# EAGLE board p1-001 (EAGLE 9.6.2)
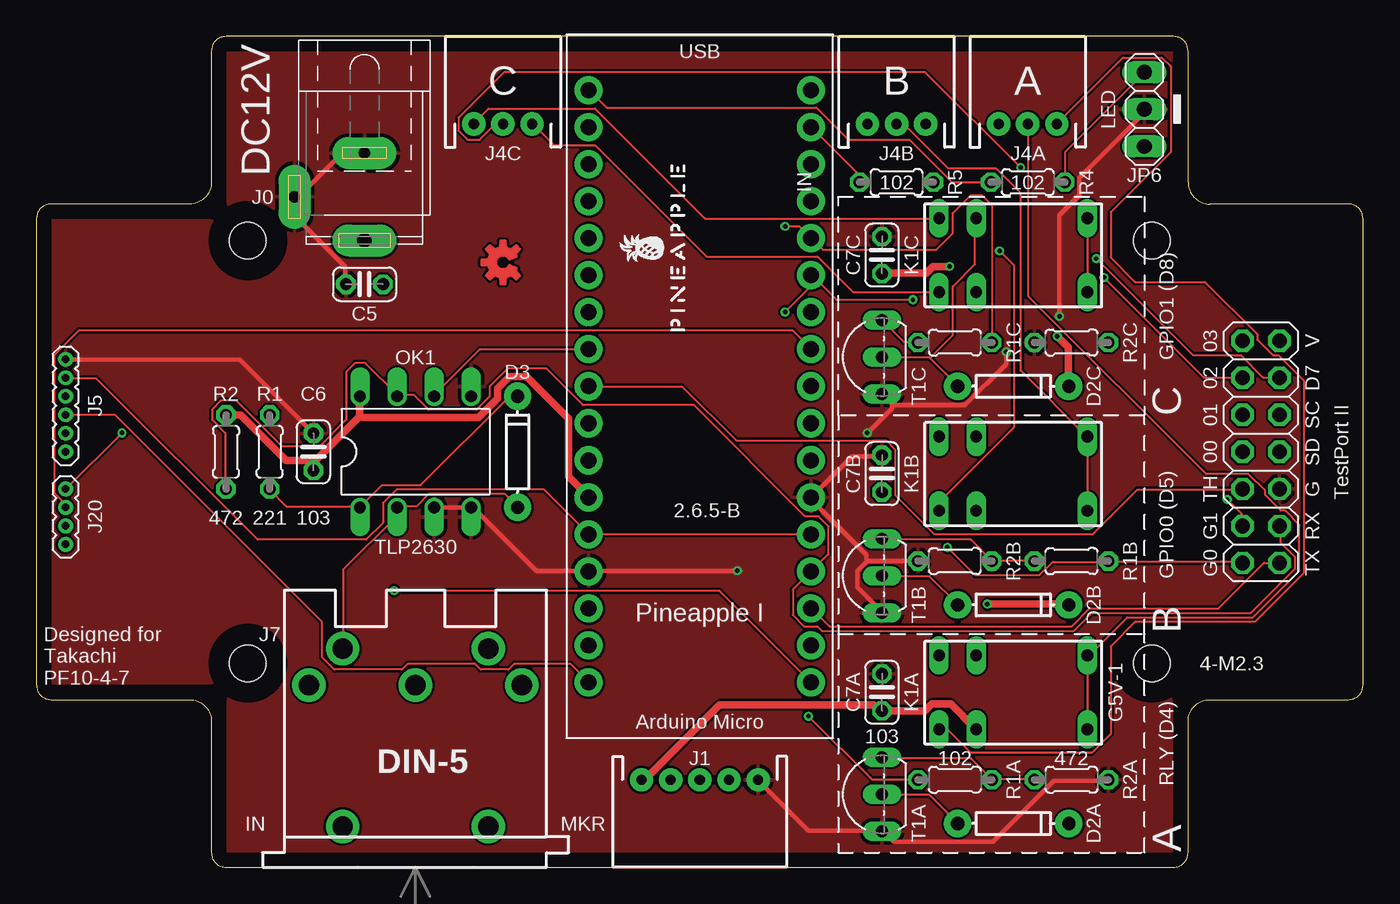
[diagram p0: board, top side]
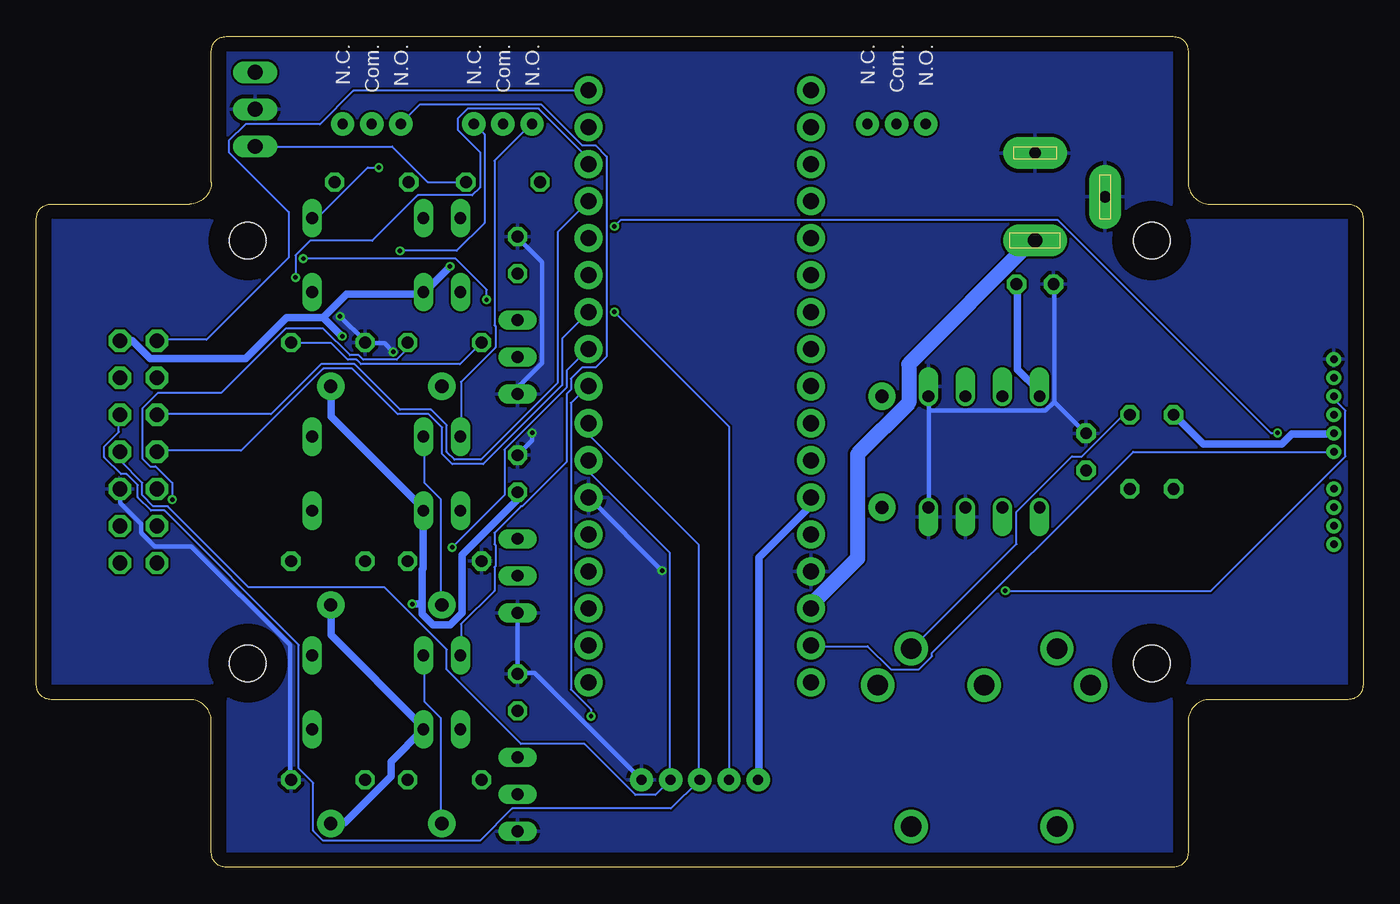
[diagram p1: board, bottom side, seen from below]

Size 91 x 57 mm. Coordinates in mm from the lower left corner, seen from the top.
Outline: 78,57 13,57 arc90 12,56 12,47 arc-90 10.5,45.5 1,45.5 arc90 0,44.5 0,12.5 arc90 1,11.5 10.5,11.5 arc-90 12,10 12,1 arc90 13,0 78,0 arc90 79,1 79,10 arc-90 80.5,11.5 90,11.5 arc90 91,12.5 91,44.5 arc90 90,45.5 80.5,45.5 arc-90 79,47 79,56 arc90 78,57
Copper layers (1*16): Top 0.035mm / dielectric 1.5mm / Bottom 0.035mm
Design rules "SeeedStudio_2layer_DRU_no_angle_20140221": minimum track width 6mil, minimum drill 12mil, track to track 6mil, track to pad 6mil, pad to pad 6mil, via to via 6mil, smd to smd 0mil, copper to edge 10mil, drill to drill 10mil, minimum pad ring 10mil, minimum via ring 6mil, stop-mask expansion 2mil, vias tented up to drill 100mil, thermal gap 10mil
Net classes: 0 default: width 0.152 mm, drill 0.152 mm, clearance 0.152 mm; 1 gnd: width 0.305 mm, drill 0.152 mm, clearance 0.152 mm; 2 power: width 0.508 mm, drill 0.152 mm, clearance 0.152 mm; 3 analog: width 0.305 mm, drill 0.152 mm, clearance 0.152 mm; 4 superpower: width 1.016 mm, drill 0.152 mm, clearance 0.152 mm
Holes 2.5 mm at 76.5,43 14.5,43 14.5,14 76.5,14
tRestrict: area 11.9,40.4 to 17.1,45.6; area 73.9,40.4 to 79.1,45.6; area 11.9,11.4 to 17.1,16.6; area 73.9,11.4 to 79.1,16.6; area 12,56 to 79,57; area 90,11.5 to 91,45.5; area 12,0 to 79,1; area 0,11.5 to 1,45.5; area 0,44.5 to 12,45.5; area 12,45.5 to 13,57; area 78,45.5 to 79,57; area 79,44.5 to 91,45.5; 8 more areas
bRestrict: area 11.9,11.4 to 17.1,16.6; area 73.9,11.4 to 79.1,16.6; area 73.9,40.4 to 79.1,45.6; area 11.9,40.4 to 17.1,45.6; area 78,0 to 79,11.5; area 79,11.5 to 91,12.5; area 90,11.5 to 91,45.5; area 79,44.5 to 91,45.5; area 78,45.5 to 79,57; area 12,56 to 79,57; area 12,45.5 to 13,57; area 0,44.5 to 12,45.5; 8 more areas

## Footprints (pad centres in the part's own frame; a part is rotated, then mirrored left to right if it is on the bottom)
C025-024X044 = drill 0.813 octagon: 1 -1.27,0; 2 1.27,0
DIODE-1N4148 = drill 0.9 pad 1.88: A -3.81,0; C 3.81,0
SPC4077 = drill 0.8 pad 2.184 long: 1 -3,0; 2 0,-4.8 | drill 1 pad 2.184 long: 3 3,0
JST-5-PTH = drill 0.7 pad 1.6: 1 -4,0; 2 -2,0; 3 0,0; 4 2,0; 5 4,0
JST-3-PTH = drill 0.7 pad 1.6: 1 -2,0; 2 0,0; 3 2,0
1X06_1.27MM = drill 0.508 pad 1: 1 0,0; 2 1.27,0; 3 2.54,0; 4 3.81,0; 5 5.08,0; 6 6.35,0
DIN5-RA-PTH = drill 1.4 pad 2.286: 1 7.3,12.5; 2 0,12.5; 3 -7.3,12.5; 4 5,15; 5 -5,15; 6 -5,2.8; 7 5,2.8
1X04_1.27MM = drill 0.508 pad 1: 1 0,0; 2 1.27,0; 3 2.54,0; 4 3.81,0
1X03 = drill 1.016 long: 1 -2.54,0; 2 0,0; 3 2.54,0
G5V1 = drill 0.813 long: 1 -5.08,-2.54; 2 -2.54,-2.54; 5 5.08,-2.54; 6 5.08,2.54; 9 -2.54,2.54; 10 -5.08,2.54
ARDUINOMICRO = drill 1.1 pad 1.93: P$1 -20.32,7.62; P$2 -17.78,7.62; P$3 -15.24,7.62; P$4 -12.7,7.62; P$5 -10.16,7.62; P$6 -7.62,7.62; P$7 -5.08,7.62; P$8 -2.54,7.62; P$9 0,7.62; P$10 2.54,7.62; P$11 5.08,7.62; P$12 12.7,-7.62; P$13 10.16,-7.62; P$14 12.7,7.62; P$15 15.24,7.62; P$16 17.78,7.62; P$17 20.32,7.62; P$18 20.32,-7.62; P$19 17.78,-7.62; P$20 15.24,-7.62; P$21 7.62,7.62; P$22 10.16,7.62; P$23 7.62,-7.62; P$24 5.08,-7.62; P$25 2.54,-7.62; P$26 0,-7.62; P$27 -2.54,-7.62; P$28 -5.08,-7.62; P$29 -7.62,-7.62; P$30 -10.16,-7.62; P$31 -12.7,-7.62; P$32 -15.24,-7.62; P$33 -17.78,-7.62; P$34 -20.32,-7.62
DIL08 = drill 0.813 offset: 1 -3.81,-3.81; 2 -1.27,-3.81; 3 1.27,-3.81; 4 3.81,-3.81; 5 3.81,3.81; 6 1.27,3.81; 7 -1.27,3.81; 8 -3.81,3.81
0204/5 = drill 0.813 octagon: 1 -2.54,0; 2 2.54,0
2X07 = drill 1.016 octagon: 1 -7.62,-1.27; 2 -7.62,1.27; 3 -5.08,-1.27; 4 -5.08,1.27; 5 -2.54,-1.27; 6 -2.54,1.27; 7 0,-1.27; 8 0,1.27; 9 2.54,-1.27; 10 2.54,1.27; 11 5.08,-1.27; 12 5.08,1.27; 13 7.62,-1.27; 14 7.62,1.27
TO92-ECB = drill 0.813 long: B 2.54,0; C 0,0; E -2.54,0

## Placement (x,y rotation side)
C5  10n  [C025-024X044]  22.5,40 180 top
C6  10n  [C025-024X044]  19,28.5 90 top
C7A  10n  [C025-024X044]  58,12 90 top
C7B  10n  [C025-024X044]  58,27 90 top
C7C  100n  [C025-024X044]  58,42 90 top
D2A  [DIODE-1N4148]  67,3 0 top
D2B  [DIODE-1N4148]  67,18 0 top
D2C  [DIODE-1N4148]  67,33 0 top
D3  [DIODE-1N4148]  33,28.5 90 top
J0  DC9V  [SPC4077]  22.5,46 270 top
J1  [JST-5-PTH]  45.5,6 180 top
J4A  RLYOUT-A  [JST-3-PTH]  68,51 0 top
J4B  RLYOUT-B  [JST-3-PTH]  59,51 0 top
J4C  RLYOUT-C  [JST-3-PTH]  32,51 0 top
J5  [1X06_1.27MM]  2,28.5 90 top
J7  DIN5  [DIN5-RA-PTH]  26,0 0 top
J20  [1X04_1.27MM]  2,22.15 90 top
JP6  LED  [1X03]  76,52 90 top
K1A  G5V1  [G5V1]  67,12 0 top
K1B  G5V1  [G5V1]  67,27 0 top
K1C  G5V1  [G5V1]  67,42 0 top
LOGO1  OSHW-LOGOS-COPPER  [OSHW-LOGO-S_COPPER]  32,41.5 90 top
MC1  ARDUINOMICRO  [ARDUINOMICRO]  45.5,33 270 top
OK1  HCPL2630  [DIL08]  26,28.5 0 top
R1  220  [0204/5]  16,28.5 90 top
R1A  1k  [0204/5]  63,6 180 top
R1B  1k  [0204/5]  71,21 0 top
R1C  1k  [0204/5]  63,36 0 top
R2  4.7k  [0204/5]  13,28.5 90 top
R2A  47k  [0204/5]  71,6 180 top
R2B  47k  [0204/5]  63,21 0 top
R2C  47k  [0204/5]  71,36 0 top
R4  1k  [0204/5]  68,47 180 top
R5  1k  [0204/5]  59,47 180 top
SV3  Testport II  [2X07]  84,28.5 90 top
T1A  2SC1815  [TO92-ECB]  58,5 90 top
T1B  2SC1815  [TO92-ECB]  58,20 90 top
T1C  2SC1815  [TO92-ECB]  58,35 90 top
U$1  PINEAPPLE450_SILK  [PINEAPPLE450_SILK]  44.5,42.5 90 top

## Library data of the parts
C5 C6 C7A C7B C7C R1 R1A R1B R1C R2 R2A R2B R2C R4 R5 = resistor
D2A D2B D2C D3 = SparkFun-DiscreteSemi; PROD_ID: DIO-08378
J0 = con-jack; OC_FARNELL: unknown; OC_NEWARK: unknown
J1 = SparkFun-Connectors; SF_ID: PRT-09917
J4A J4B J4C = SparkFun-Connectors; PROD_ID: WIRE-10037; SF_ID: PRT-09915
J5 J20 = SparkFun-Connectors
J7 = SparkFun-Connectors; PROD_ID: CONN-09481
JP6 SV3 = pinhead
K1A K1B K1C = relay; MPN: G5V-1-DC24; OC_FARNELL: 9949593; OC_NEWARK: 36M6377
LOGO1 = SparkFun-Aesthetics
MC1 = adafruit
OK1 = optocoupler; MF: AGILENT TECHNOLOGIES; MPN: HCPL-2630-000E; OC_FARNELL: 9994904; OC_NEWARK: 88H7813
T1A T1B T1C = transistor
U$1 = pineapple

## Nets
ANLG0 [analog]: MC1.P$31
ANLG1 [analog]: MC1.P$30
ANLG2 [analog]: MC1.P$29
ANLG3 [analog]: MC1.P$28
AREF: MC1.P$32
D7GATE: J1.4 MC1.P$6 SV3.11
DTCT0: MC1.P$7 SV3.8
DTCT1: MC1.P$4 SV3.10
DTCT2: MC1.P$3 SV3.12
DTCT3: MC1.P$1 SV3.14
GND [gnd]: C5.2 C6.2 C7A.2 C7B.2 C7C.2 J0.1 J0.2 J1.1 J5.6 JP6.2 MC1.P$12 MC1.P$21 OK1.3 OK1.4 OK1.5 R2A.1 R2B.1 R2C.1 SV3.5 T1A.E T1B.E T1C.E
GPIO0: J20.3 MC1.P$8 R1B.2 SV3.2
GPIO1: J20.4 MC1.P$5 R1C.2 SV3.4
LED0: MC1.P$34 R4.2
LED0A: JP6.3 R4.1
LED1: MC1.P$2 R5.2
LED1A: JP6.1 R5.1
MIDIINSND: D3.C OK1.1 R1.1
MIRTN: D3.A J7.5 OK1.2
MISND: J7.4 R1.2
MISO: J5.1 MC1.P$19
MNTR: MC1.P$27 OK1.6
MOSI: J5.4 MC1.P$17
RLY: MC1.P$9 R1A.2
RLYDRV: R1A.1 R2A.2 T1A.B
RLYDRV1: R1B.1 R2B.2 T1B.B
RLYDRV2: R1C.1 R2C.2 T1C.B
RLYOUT1: J4A.1 K1A.10
RLYOUT1B: J4B.1 K1B.10
RLYOUT1C: J4C.1 K1C.10
RLYOUT2: J4A.2 K1A.5 K1A.6
RLYOUT2B: J4B.2 K1B.5 K1B.6
RLYOUT2C: J4C.2 K1C.5 K1C.6
RLYOUT3: J4A.3 K1A.1
RLYOUT3B: J4B.3 K1B.1
RLYOUT3C: J4C.3 K1C.1
RLYSNK: D2A.A K1A.9 T1A.C
RLYSNK1: D2B.A K1B.9 T1B.C
RLYSNK2: D2C.A K1C.9 T1C.C
RST: J5.5 MC1.P$13 MC1.P$22
RX: MC1.P$14 OK1.7 R2.1 SV3.3
SCK: J5.3 MC1.P$18
SCL: J1.3 MC1.P$10 SV3.9
SDA: J1.2 MC1.P$11 SV3.7
THS: MC1.P$26 SV3.6
TX: MC1.P$15 SV3.1
VCC [power]: C5.1 C6.1 C7A.1 C7B.1 C7C.1 D2A.C D2B.C D2C.C J1.5 J5.2 K1A.2 K1B.2 K1C.2 MC1.P$23 OK1.8 R2.2 SV3.13
VDD [power]: MC1.P$33
VIN [superpower]: J0.3 MC1.P$20

## Tracks (layer width: path | path; a pad name or v marks a point on that pad's centre or on a via)
D7GATE  (via drill 0.3)
  Top 0.152: v72.69,41.76 79.32,35.13 82.6,35.13 84.12,33.6 85.27,33.6 SV3.11 | v60.12,38.94 54.86,38.94 53.19,40.62 MC1.P$6 53.49,40.23 v51.36,38.1
  Bottom 0.152: v72.69,41.76 62.26,41.76 60.12,39.62 v60.12,38.94 | v51.36,38.1 43.51,30.25 43.51,6.02 J1.4
DTCT0
  Bottom 0.152: SV3.8 82.68,28.57 76.96,28.57 71.32,34.21 69.34,34.21 66.22,31.09 64.08,31.09 63.17,30.18 63.17,28.35 62.48,27.66 60.35,27.66 54.94,33.07 54.94,36.27 53.19,38.02 MC1.P$7
DTCT1
  Bottom 0.152: SV3.10 82.68,31.09 74.91,31.09 71.48,34.52 69.19,34.52 66.06,31.39 63.93,31.39 62.87,30.33 62.87,28.5 62.33,27.96 60.5,27.96 55.24,33.22 55.24,43.59 53.19,45.64 MC1.P$4
DTCT2  (via drill 0.3)
  Top 0.152: v73.23,40.46 80.09,33.6 82.68,33.6 SV3.12
  Bottom 0.152: v73.23,40.46 73.23,41.99 72.24,42.98 67.97,42.98 64.85,46.1 61.11,46.1 60.58,46.63 60.58,49.07 62.1,50.6 62.1,51.36 61.42,52.05 56.54,52.05 53.19,48.69 53.19,48.31 MC1.P$3
DTCT3
  Bottom 0.152: SV3.14 82.68,36.2 79.32,36.2 73.69,41.83 73.69,44.96 77.8,49.07 77.8,49.84 76.66,50.98 71.55,50.98 69.27,53.26 53.19,53.26 MC1.P$1
GND  (via drill 0.3)
  Top 0.305: OK1.3 29.79,24.69 OK1.4 29.95,24.69 34.29,20.34 37.87,20.34 MC1.P$12 38.02,20.34 v48.08,20.34 | C5.2 21.18,40.01 21.18,41.22 17.75,44.65 17.75,45.95 J0.2 17.91,45.95 20.95,49 22.48,49 J0.1 | J5.6 2.06,34.82 13.95,34.82 18.97,29.79 C6.2 | v66.52,35.36 66.52,34.52 63.7,31.7 58.75,31.7 | 58.75,31.7 58.06,32.38 T1C.E | v70.18,37.8 70.18,44.73 71.55,46.1 71.55,47.32 75.97,51.74 75.97,51.97 JP6.2 | C7B.2 57.99,28.19 55.93,28.19 53.19,25.45 MC1.P$21 53.19,25.3 53.19,25.15 56.92,21.41 56.92,21.11 57,21.03 | 57,21.03 60.43,21.03 R2B.1 | 57,21.03 56.31,20.34 56.31,19.2 57.99,17.53 T1B.E | J1.1 49.53,5.94 52.96,2.52 57.99,2.52 T1A.E 58.14,2.44 58.83,1.75 65.61,1.75 69.8,5.94 73.53,5.94 R2A.1 | v57,29.79 58.67,31.47 58.67,31.62 58.75,31.7
  Bottom 0.305: 29.79,31.32 29.79,24.77 OK1.4 | 29.79,31.32 29.79,32.31 OK1.5 | 21.18,31.93 21.18,39.93 C5.2 | 21.18,31.93 19.05,29.79 C6.2 | 29.79,31.32 21.79,31.32 21.18,31.93 | T1C.E 57.99,32.46 57.99,32.92 56.31,34.59 56.31,41.53 57.99,43.2 C7C.2 | v66.52,35.36 67.13,35.97 68.43,35.97 R2C.1 68.5,36.12 v70.18,37.8 | T1B.E 57.99,17.45 57.99,13.34 C7A.2 57.84,13.34 56.84,13.34 49.53,6.02 J1.1 | SV3.5 85.27,25.91 85.27,24.99 83.82,23.55 83.82,22.94 82.91,22.02 80.39,22.02 73.61,15.24 73.61,6.02 R2A.1 | v57,29.79 57,29.26 57.99,28.27 C7B.2 | v48.08,20.34 MC1.P$21
  pour Top: -1,-1 92,-1 92,58 -1,58
  pour Bottom: -2,-2 93,-2 93,59 -2,59
GPIO0  (via drill 0.3)
  Top 0.152: SV3.2 82.68,20.95 73.61,20.95 R1B.2 73.53,20.95 69.72,20.95 68.81,20.04 64.39,20.04 v62.48,21.95 | J20.3 1.98,24.77 1.98,24.92 1.22,25.68 1.22,35.13 2.9,36.8 51.89,36.8 53.11,35.59 MC1.P$8
  Bottom 0.152: v62.48,21.95 58.9,25.53 58.9,28.65 54.63,32.92 54.63,34.06 53.19,35.51 MC1.P$8
GPIO1  (via drill 0.3)
  Top 0.152: v5.87,29.79 2.06,25.98 J20.4 | v51.36,43.97 52.35,43.97 53.11,43.2 MC1.P$5 53.19,43.13 53.95,42.37 61.72,42.37 62.87,43.51 62.87,44.88 64.08,46.1 64.85,46.1 65.53,45.41 65.53,36.04 R1C.2 | v81.69,25.22 82.68,24.23 82.68,23.47 SV3.4
  Bottom 0.152: v5.87,29.79 6.33,29.79 20.95,44.42 50.9,44.42 v51.36,43.97 | v81.69,25.22 81.69,26.36 82.83,27.51 83.21,27.51 83.74,28.04 83.74,31.47 82.68,32.54 78.33,32.54 73.91,36.96 71.32,36.96 69.49,35.13 68.89,35.13 68.58,34.82 66.29,34.82 65.61,35.51 65.61,35.97 R1C.2
LED0
  Top 0.152: R4.2 65.46,47.02 62.79,47.02 59.89,49.91 55.7,49.91 53.49,52.12 39.09,52.12 37.95,53.26 MC1.P$34
LED0A
  Top 0.152: R4.1 70.56,47.02 70.56,49.07 75.97,54.48 JP6.3
LED1
  Top 0.152: R5.2 56.39,47.02 56.39,47.55 53.19,50.75 MC1.P$2
LED1A
  Bottom 0.152: R5.1 61.57,47.02 64.16,47.02 66.6,49.45 75.97,49.45 JP6.1
MIDIINSND
  Top 0.152: R1.1 16,25.91 17.14,24.77 22.17,24.77 OK1.1 22.25,24.77 23.7,26.21 26.36,26.21 32.46,32.31 D3.C
MIRTN
  Top 0.152: D3.A 32.99,24.77 32.16,25.6 26.9,25.6 26.06,24.77 24.77,24.77 OK1.2 24.69,24.69 24.69,24.08 21.03,20.42 21.03,15.01 J7.5
MISND
  Bottom 0.152: R1.2 16,31.01 16.46,31.01 19.28,28.19 19.96,28.19 23.77,24.38 23.77,22.17 30.94,15.01 J7.4
MISO
  Bottom 0.152: J5.1 2.06,28.5 15.77,28.5 29.57,14.71 29.57,14.48 30.48,13.56 32.38,13.56 33.98,15.16 37.87,15.16 MC1.P$19
MNTR
  Top 0.152: OK1.6 27.28,32.38 30.4,35.51 37.87,35.51 MC1.P$27
MOSI  (via drill 0.3)
  Top 0.152: v24.54,18.97 46.86,18.97 53.11,12.72 MC1.P$17
  Bottom 0.152: v24.54,18.97 10.44,18.97 1.22,28.19 1.22,31.32 1.98,32.08 1.98,32.31 J5.4
RLY  (via drill 0.3)
  Top 0.152: v52.96,10.36 57.3,6.02 60.43,6.02 R1A.2
  Bottom 0.152: v52.96,10.36 52.96,10.82 54.33,12.19 54.33,31.85 53.19,32.99 MC1.P$9
RLYDRV
  Top 0.152: R2A.2 68.43,6.02 65.61,6.02 R1A.1 65.53,6.02 64.08,7.47 58.06,7.47 T1A.B
RLYDRV1
  Top 0.152: R1B.1 68.43,21.03 65.61,21.03 R2B.2 65.53,21.03 64.08,22.48 58.06,22.48 T1B.B
RLYDRV2
  Top 0.152: R1C.1 60.43,36.04 59.51,36.04 58.06,37.49 T1C.B
  Bottom 0.152: R2C.2 73.53,35.97 70.79,35.97 69.65,34.82 69.04,34.82 68.73,34.52 61.95,34.52 60.5,35.97 R1C.1
RLYOUT1
  Bottom 0.152: K1A.10 61.87,14.55 61.87,16.69 59.59,18.97 59.59,20.57 59.51,20.65 59.51,22.1 59.59,22.17 59.59,22.94 57.76,24.77 57.68,24.77 54.63,27.81 54.63,32.46 54.33,32.77 54.33,33.53 53.57,34.29 52.65,34.29 51.89,35.05 51.89,48.77 52.65,49.53 53.57,49.53 56.39,52.35 64.69,52.35 65.99,51.05 J4A.1
RLYOUT1B
  Bottom 0.152: K1B.10 61.87,29.57 61.87,33.3 59.51,35.66 59.51,37.11 59.59,37.19 59.59,48.46 57.07,50.98 J4B.1
RLYOUT1C
  Top 0.152: K1C.10 61.87,44.5 45.87,44.5 38.33,52.05 31.01,52.05 30.02,51.05 J4C.1
RLYOUT2
  Top 0.152: K1A.5 72.08,9.53 72.08,14.48 K1A.6 72.16,14.48 74.83,17.14 83.44,17.14 86.64,20.34 86.64,23.47 85.65,24.46 85.34,24.46 84.28,25.53 84.28,25.83 83.13,26.98 80.24,26.98 68.05,39.17 68.05,50.98 J4A.2
RLYOUT2B
  Top 0.152: K1B.5 72.08,29.49 K1B.6 72.01,29.57 67.51,34.06 67.51,46.25 65.84,47.93 62.56,47.93 59.51,50.98 59.05,50.98 J4B.2
RLYOUT2C  (via drill 0.3)
  Top 0.152: K1C.5 72.08,39.47 72.08,44.5 K1C.6 | v67.51,48.01 60.96,54.56 32.08,54.56 28.96,51.44 28.96,50.52 29.57,49.91 30.4,49.91 31.47,50.98 31.93,50.98 J4C.2
  Bottom 0.152: v67.51,48.01 68.28,48.01 71.7,44.58 72.01,44.58 K1C.6
RLYOUT3
  Top 0.152: K1A.1 61.95,9.45 62.48,9.45 64.08,7.85 72.39,7.85 73.69,9.14 73.69,15.16 75.36,16.84 83.59,16.84 86.94,20.19 86.94,33.38 85.19,35.13 84.81,35.13 83.74,36.2 83.74,36.58 80.16,40.16 75.36,40.16 73.69,41.83 73.69,44.96 77.8,49.07 77.8,54.94 77.19,55.55 74.52,55.55 70.03,51.05 J4A.3
RLYOUT3B  (via drill 0.3)
  Top 0.152: v66.06,42.29 67.06,41.3 67.06,30.18 61.95,25.07 61.95,24.46 K1B.1
  Bottom 0.152: v66.06,42.29 62.18,42.29 60.27,44.2 60.27,50.29 60.96,50.98 J4B.3
RLYOUT3C
  Top 0.152: K1C.1 61.87,39.47 56.01,39.47 53.57,41.91 45.95,41.91 38.33,49.53 35.51,49.53 34.06,50.98 J4C.3
RLYSNK
  Top 0.152: T1A.C 58.06,4.95 61.27,4.95 63.17,3.05 D2A.A
  Bottom 0.152: K1A.9 64.39,14.48 64.39,11.35 63.25,10.21 63.25,3.05 D2A.A
RLYSNK1
  Top 0.152: T1B.C 58.06,19.96 61.27,19.96 63.17,18.06 D2B.A
  Bottom 0.152: K1B.9 64.39,29.49 64.39,26.36 63.25,25.22 63.25,18.06 D2B.A
RLYSNK2
  Top 0.152: 61.3,34.94 63.17,33.07 D2C.A | 61.3,34.94 61.27,34.98 58.06,34.98 T1C.C | 61.3,34.94 62.87,36.5 62.87,39.85 64.39,41.38 64.39,44.5 K1C.9
RST
  Top 0.152: J5.5 2.06,33.53 4.12,33.53 15.16,22.48 22.63,22.48 23.77,23.62 23.77,24.99 24.69,25.91 34.82,25.91 37.87,22.86 MC1.P$13 37.95,22.86 53.11,22.86 MC1.P$22
RX
  Top 0.152: R2.1 12.95,25.98 12.95,29.79 12.04,30.71 12.04,31.39 12.65,32 13.72,32 16.84,28.88 19.43,28.88 21.26,30.71 21.26,33.98 21.87,34.59 22.55,34.59 24.77,32.38 OK1.7 24.84,32.38 25.91,32.38 26.9,31.39 30.18,31.39 31.09,32.31 31.09,32.99 32.31,34.21 34.98,34.21 37.49,31.7 45.11,31.7 52.73,24.08 53.65,24.08 54.33,23.39 54.33,21.49 53.19,20.34 MC1.P$14 53.11,20.27 51.89,19.05 51.89,17.3 52.65,16.54 53.57,16.54 53.87,16.23 71.17,16.23 72.39,17.45 83.29,17.45 86.33,20.5 86.33,21.26 85.34,22.25 85.34,23.39 SV3.3
SCK
  Top 0.152: J5.3 2.06,31.01 5.41,31.01 19.58,16.84 19.58,14.4 20.42,13.56 25.07,13.56 25.45,13.95 30.1,13.95 30.48,13.56 32.38,13.56 32.77,13.95 36.65,13.95 37.87,12.72 MC1.P$18
SCL
  Bottom 0.152: SV3.9 85.34,31.01 85.34,29.87 86.33,28.88 86.33,28.12 85.19,26.98 84.81,26.98 84.05,26.21 84.05,25.38 83.13,24.46 82.22,24.46 73,15.24 73,6.78 72.01,5.79 72.01,2.52 71.32,1.83 60.58,1.83 58.37,4.04 47.47,4.04 45.57,5.94 J1.3 45.57,6.02 45.57,22.1 53.11,29.64 53.11,30.4 MC1.P$10
SDA
  Bottom 0.152: SV3.7 85.27,27.89 83.74,26.36 83.74,25.53 82.98,24.77 81.99,24.77 76.43,19.2 67.13,19.2 62.87,14.94 62.87,13.56 57.76,8.46 53.42,8.46 49.91,4.95 48.54,4.95 47.55,5.94 J1.2 47.55,6.02 47.55,21.57 53.11,27.13 53.11,27.89 MC1.P$11
THS
  Top 0.152: SV3.6 82.68,25.91 75.51,25.91 72.47,22.86 61.57,22.86 58.9,25.53 58.9,28.65 58.29,29.26 48.01,29.26 44.27,32.99 37.95,32.99 MC1.P$26
TX
  Top 0.152: SV3.1 84.2,20.88 81.08,17.75 72.24,17.75 71.02,16.54 54.41,16.54 53.19,17.75 MC1.P$15
VCC  (via drill 0.3)
  Top 0.508: v62.64,41.22 61.49,41.22 61.04,40.77 58.06,40.77 C7C.1 | v70.03,36.42 70.79,35.66 70.79,33.07 D2C.C | 22.17,30.94 19.05,27.81 19.05,27.28 C6.1 18.82,27.89 17.14,27.89 14.02,31.01 13.03,31.01 R2.2 | 22.17,30.94 22.17,32.31 OK1.8 | K1A.2 64.39,9.53 62.71,11.2 61.42,11.2 60.96,10.74 58.06,10.74 C7A.1 57.76,10.82 57.45,11.12 46.86,11.12 41.76,6.02 41.53,6.02 J1.5 | 22.17,30.94 22.4,30.86 30.33,30.86 31.62,32.16 31.62,32.84 32.46,33.68 33.6,33.68 36.5,30.79 36.5,26.82 37.87,25.45 MC1.P$23 | v65.23,18.06 70.79,18.06 D2B.C
  Bottom 0.508: 64.54,18.06 64.54,20.42 64.47,20.5 64.47,24.38 K1B.2 64.54,24.69 70.79,30.94 70.79,32.99 D2C.C | 64.54,18.06 64.54,17.37 63.78,16.61 62.64,16.61 61.8,17.45 61.8,21.41 58.06,25.15 58.06,25.68 C7B.1 | v62.64,41.22 64.39,39.47 K1C.2 64.69,39.32 69.72,39.32 71.32,37.72 | 71.32,37.72 73.84,37.72 76.66,34.9 83.21,34.9 84.43,36.12 SV3.13 | 71.32,37.72 v70.03,36.42 | J5.2 2.06,29.72 4.88,29.72 5.56,29.03 10.97,29.03 12.95,31.01 R2.2 | C5.1 23.7,39.93 23.7,34.14 22.25,32.69 22.25,32.38 OK1.8 | D2A.C 70.79,3.05 69.88,3.05 66.67,6.25 66.67,7.24 K1A.2 64.54,9.68 70.79,15.93 70.79,17.98 D2B.C | MC1.P$23 37.95,25.38 37.95,24.77 41.45,21.26 41.45,6.02 J1.5 | v65.23,18.06 64.54,18.06
VIN
  Bottom 1.016: MC1.P$20 37.87,17.83 37.87,17.98 34.67,21.18 34.67,28.35 31.17,31.85 31.17,34.52 22.71,42.98 22.55,42.98 J0.3

## Text on the board
tNames: DC12V | USB | C | B | A | LED | IN | 102 | 102 | GPIO1 (D8) | 03 | V | 02 | D7 | C | 01 | SC | 00 | SD | TestPort II | TH | G | 472 | 221 | 103 | 2.6.5-B | GPIO0 (D5) | G1 | RX | TLP2630 | G0 | TX | Pineapple I | B | Designed for / Takachi / PF10-4-7 | 4-M2.3 | G5V-1 | Arduino Micro | 103 | 102 | 472 | RLY (D4) | IN | MKR | A
bNames: N.O. | Com. | N.C. | N.O. | Com. | N.C. | N.O. | Com. | N.C.